# Altium PCB figo_pcb_v4.PcbDoc (part 2 of 2)
Units mil, origin at the board's own origin, x right, y up, seen from the top; angles counter-clockwise.
Board outline 3996.06 x 2756.8 mil, 2 copper layers (Top, Bottom); 57 components, 52 nets, 210 pads, 169 vias.
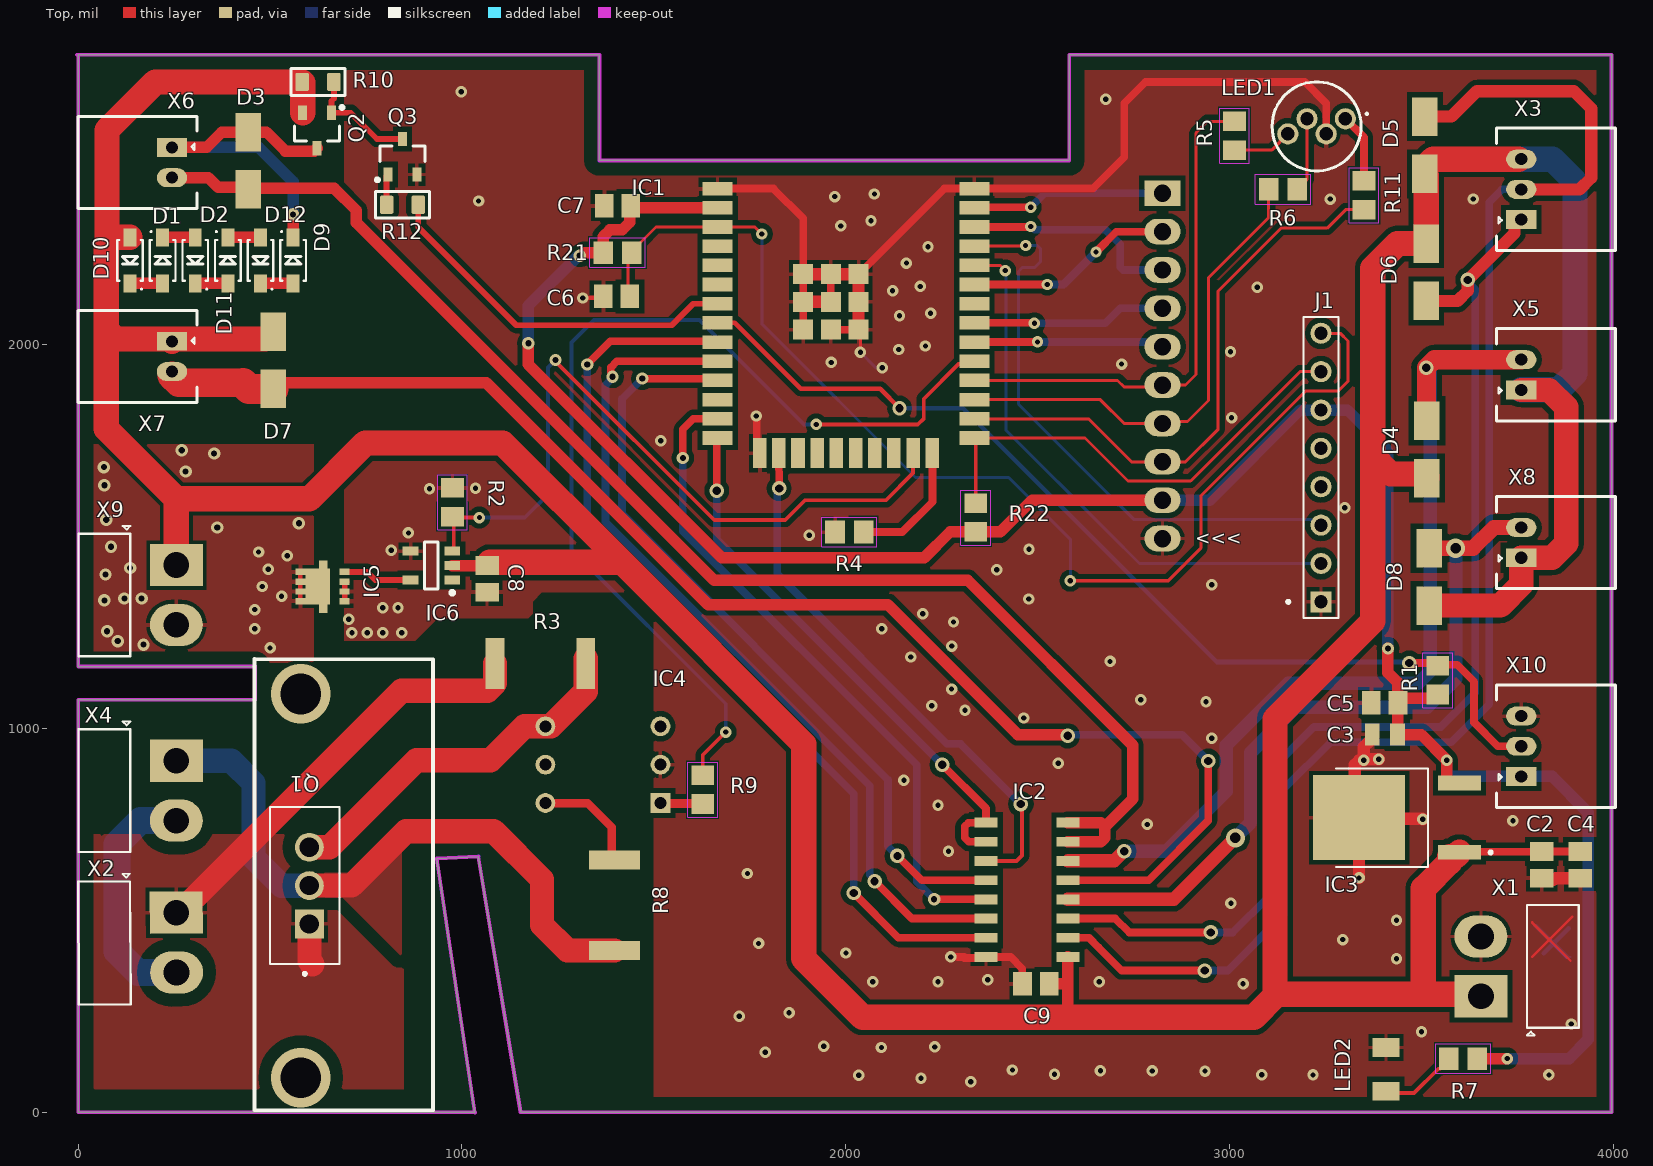
[diagram p0: Top view]

## Polygon pours and split planes (outlines as drawn) (continued)
NetQ1_2 on Top "NETQ1_2_L01_P035" (solid, pour order 35): 520.72,559.68 688.35,559.68 843.35,404.68 843.35,734.68 733.35,624.68 522.93,624.68 522.93,564.17

## Keep-outs
Keep-Out Layer:
  lines w10: -3.79,2755.91 1358.27,2755.91 1358.27,2480.31 2582.68,2480.31 2582.68,2755.91 3996.06,2755.91 3996.06,0 1153.54,0.01 ; 0,2755.91 0,1161.42 460.63,1161.42 460.63,1074.8 0,1074.8 0,0 1031.5,0 ; 1033.68,-0.89 934.58,660.93 1042.81,666.25 1152.99,0.01

## Silkscreen, mask and mechanical layers (free items; w line width, h text height)
Top Overlay:
  lines w10: 459.57,1180.39 925,1180.39 925,5 459.57,5 459.57,1181.5
  text "<<<" at 2911.57,1478.5 h35
Dimension:
  lines w0: -3.91,3051.24 -2.41,3052.62
Board:
  lines w10: -3.79,2755.91 1358.27,2755.91 1358.27,2480.31 2582.68,2480.31 2582.68,2755.91 3996.06,2755.91 3996.06,0 1153.54,0.01 ; 0,2755.91 0,1161.42 460.63,1161.42 460.63,1074.8 0,1074.8 0,0 1031.5,0 ; 1033.68,-0.89 934.58,660.93 1042.81,666.25 1152.99,0.01
Top Assembly (Mech7):
  text "A" at 3592.92,2595.98 h62
  text "C" at 551.55,2554.48 h62
  text "C" at 3597.17,2413.38 h62
  text "A" at 546.55,2389.48 h62
  text "C" at 3596.81,2254.61 h62
  text "A" at 3598.43,2090.55 h62
  text "C" at 603.19,2024.72 h62
  text "A" at 603.19,1829.72 h62
  text "A" at 3610.24,1795.28 h62
  text "C" at 3610.24,1606.3 h62
  text "EatFigo V4.2" at 1271.65,47.24 h108.5

## Dimensions
0,0 to 3996.06,0 on Assembly Top
3996.06,2755.91 to 3996.06,0 on Assembly Top